# EAGLE board Drone PCB (EAGLE 9.6.2)
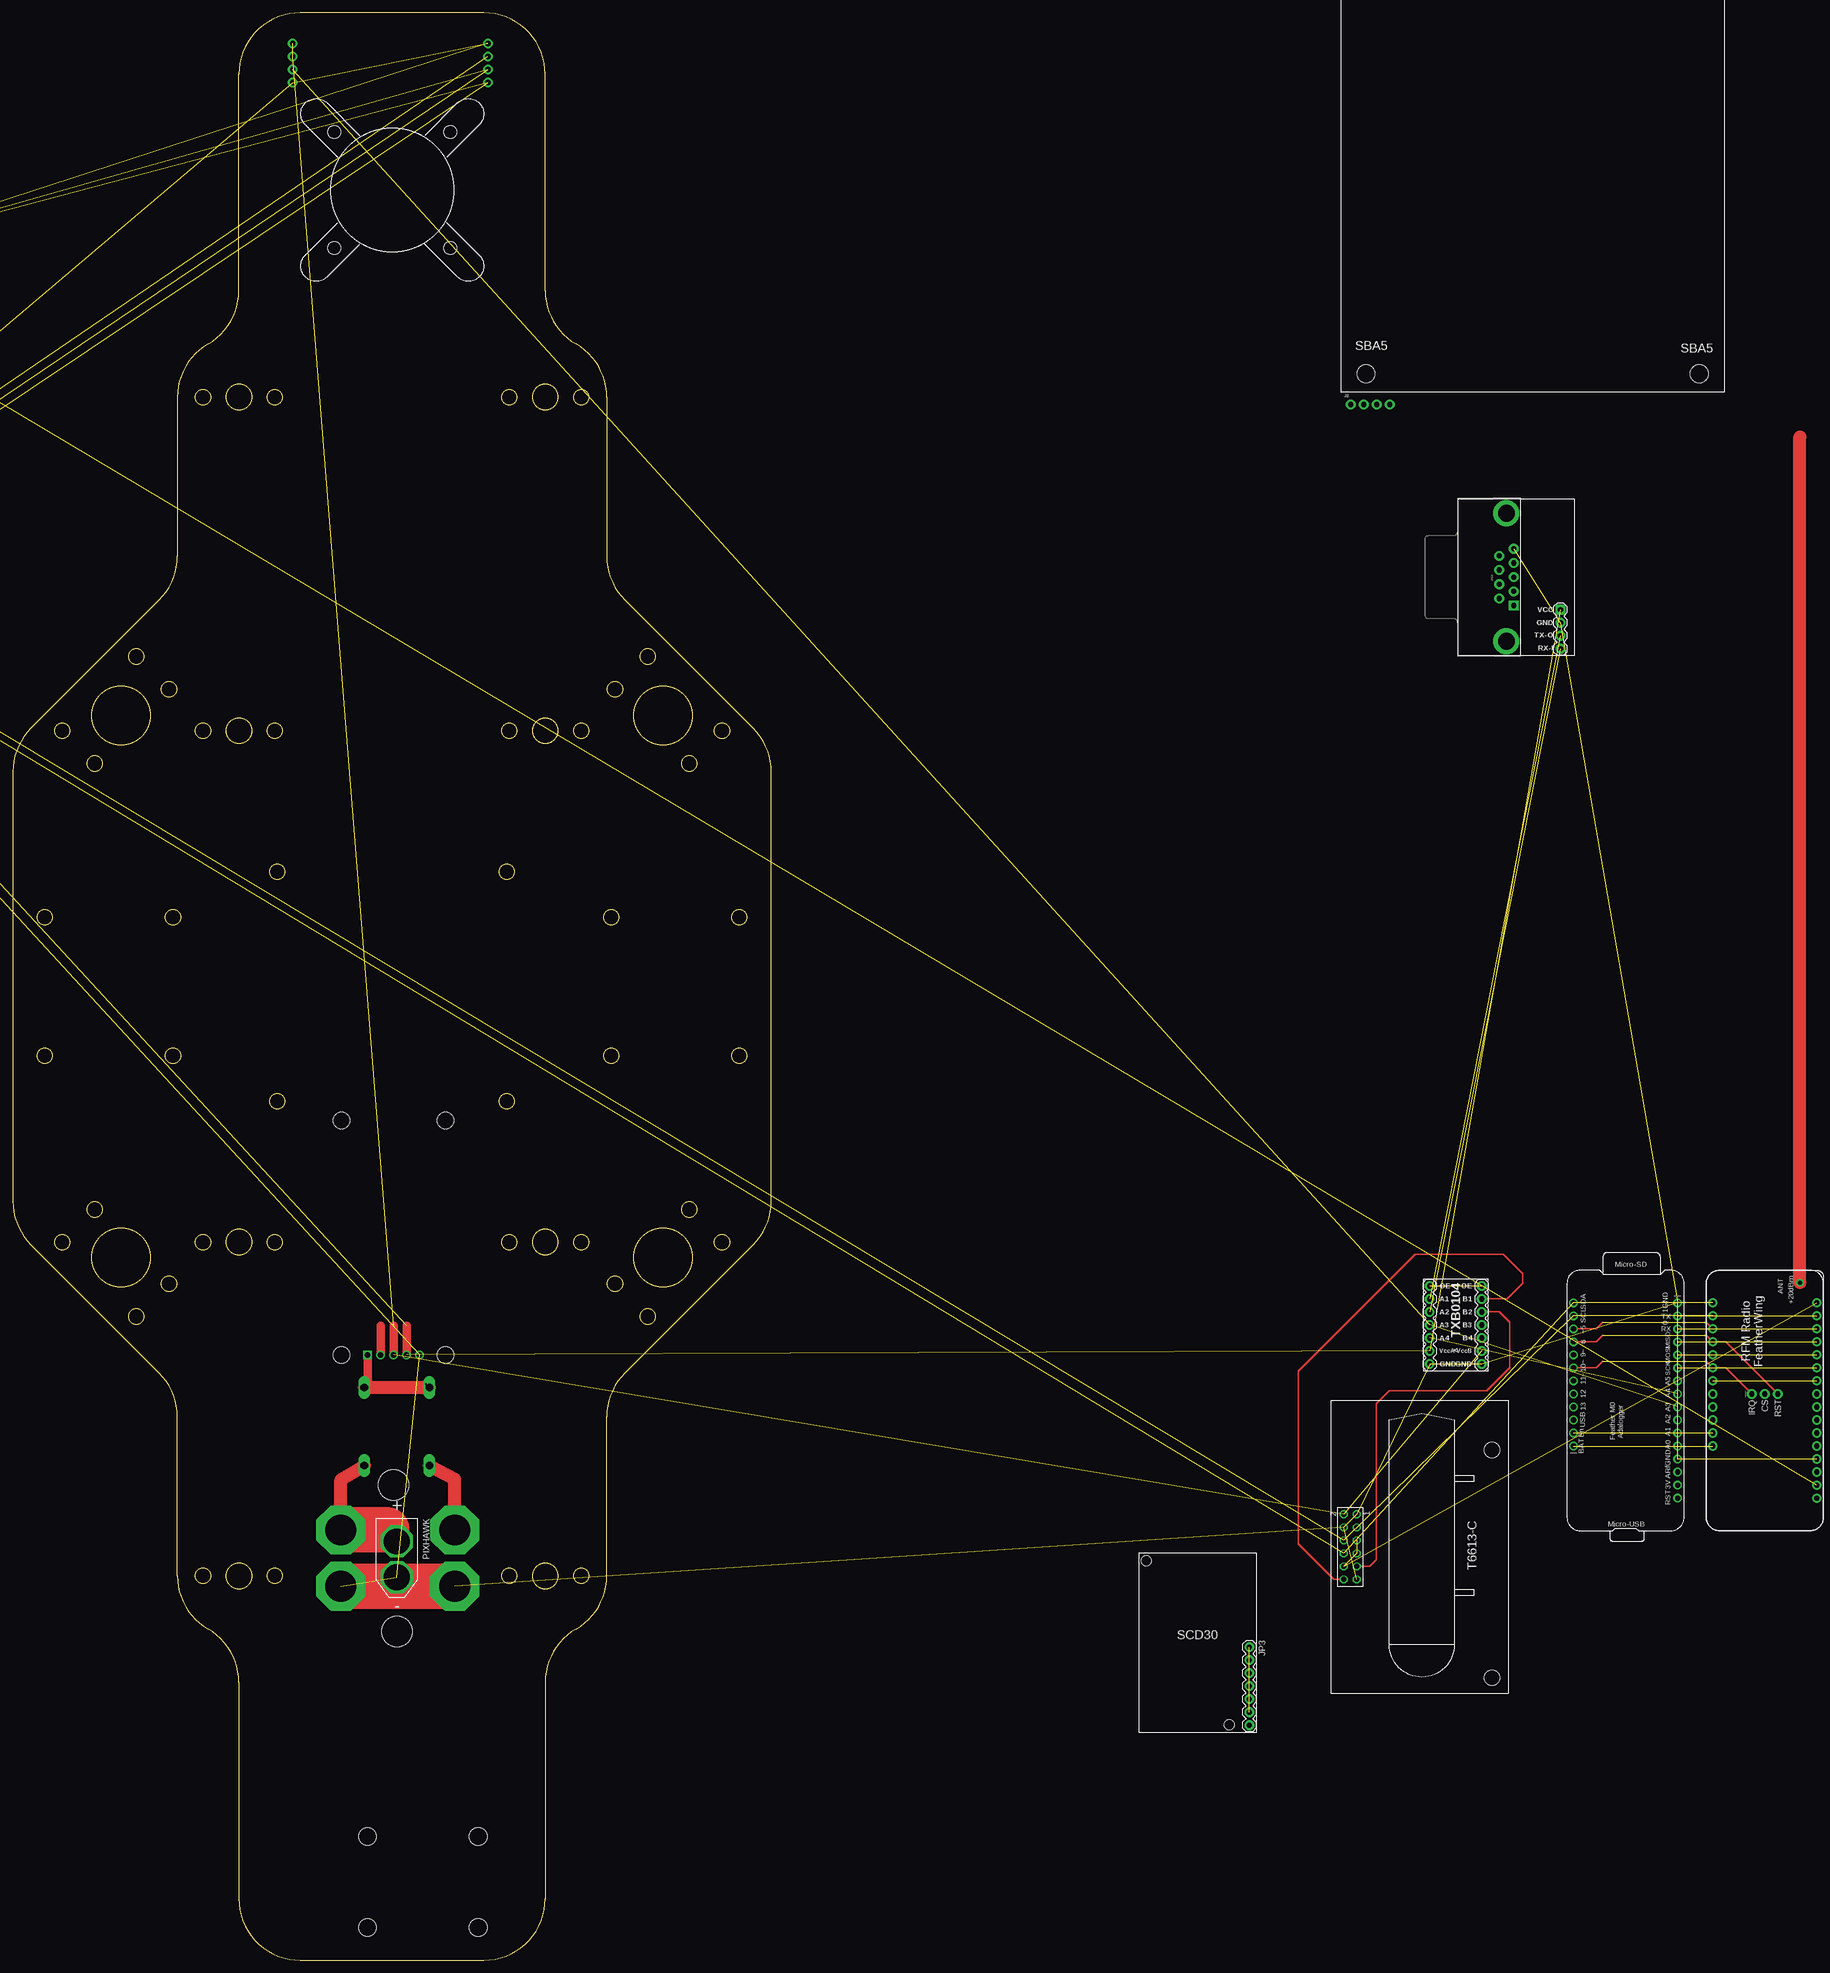
[diagram p0: board, top side]
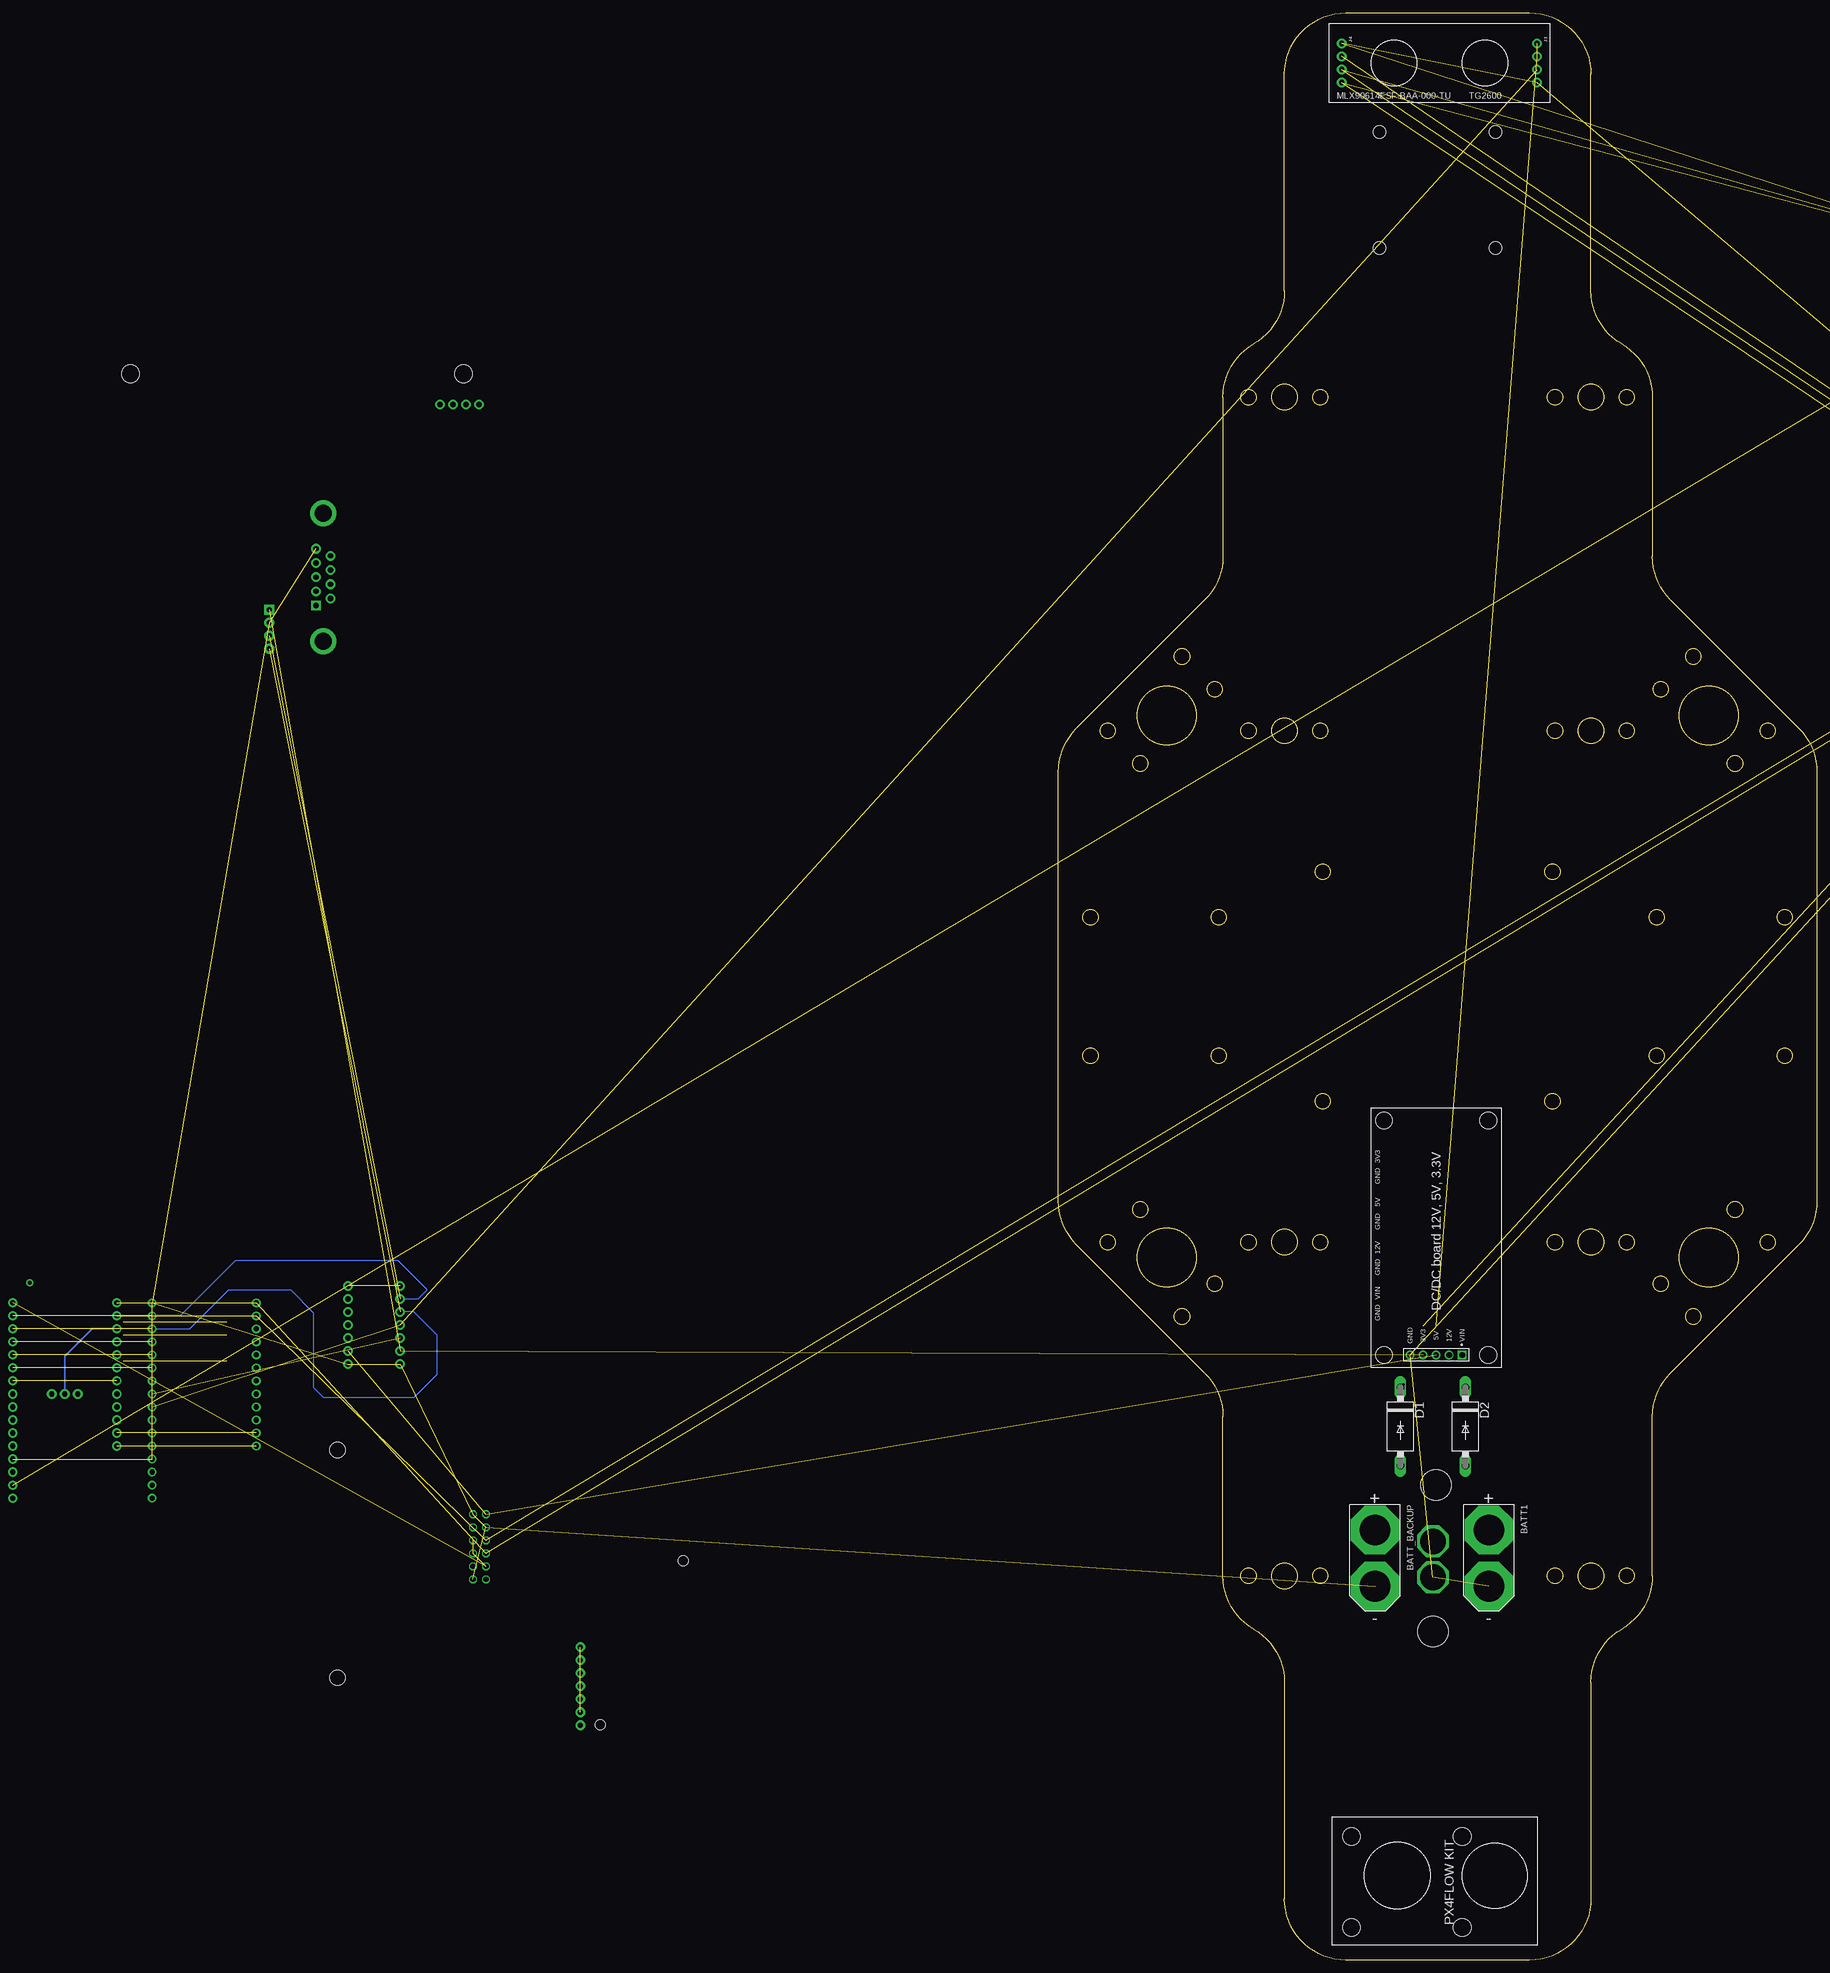
[diagram p1: board, bottom side, seen from below]

Size 148 x 380 mm. Coordinates in mm from the lower left corner, seen from the top.
Outline: 109.9,64.61 arc60 115.9,75 115.9,106.08 arc-45 119.42,114.57 144.49,139.64 arc45 148,148.12 148,231.88 arc45 144.49,240.36 119.42,265.43 arc-45 115.9,273.92 115.9,305 arc60 109.9,315.39 arc-60 103.9,325.79 103.9,368 arc90 91.9,380 56.1,380 arc90 44.1,368 44.1,325.79 arc-60 38.1,315.39 arc60 32.1,305 32.1,273.92 arc-45 28.59,265.43 3.52,240.36 arc45 0,231.88 0,148.12 arc45 3.52,139.64 28.59,114.57 arc-45 32.1,106.08 32.1,75 arc60 38.1,64.61 arc-60 44.1,54.22 44.1,12 arc90 56.1,0 91.9,0 arc90 103.9,12 103.9,54.22 arc-60 109.9,64.61
Outline: circle at 103.9,239.9 radius 2.5
Outline: circle at 116.75,203.5 radius 1.5
Outline: circle at 138.38,239.89 radius 1.5
Outline: circle at 132.02,233.52 radius 1.5
Outline: circle at 117.52,248.02 radius 1.5
Outline: circle at 123.89,254.38 radius 1.5
Outline: circle at 51.1,75 radius 1.5
Outline: circle at 51.1,305 radius 1.5
Outline: circle at 37.1,305 radius 1.5
Outline: circle at 37.1,75 radius 1.5
Outline: circle at 44.1,305 radius 2.5
Outline: circle at 96.9,75 radius 1.5
Outline: circle at 126.89,242.89 radius 5.75
Outline: circle at 44.1,75 radius 2.5
Outline: circle at 96.9,239.9 radius 1.5
Outline: circle at 110.9,239.9 radius 1.5
Outline: circle at 141.75,203.5 radius 1.5
Outline: circle at 116.75,176.5 radius 1.5
Outline: circle at 141.75,176.5 radius 1.5
Outline: circle at 6.25,176.5 radius 1.5
Copper layers (1*16): Top 0.035mm / dielectric 1.5mm / Bottom 0.035mm
Design rules "default": minimum track width 6mil, minimum drill 0.35mm, track to track 6mil, track to pad 6mil, pad to pad 6mil, via to via 6mil, smd to smd 6mil, copper to edge 40mil, drill to drill 6mil, minimum pad ring 10mil, minimum via ring 8mil, stop-mask expansion 4mil, vias tented up to drill 0mil, thermal gap 10mil
Holes 3.3 mm at -88.9,342.9 -68.58,342.9 -63.5,305.05 -43.18,305.05 -63.5,269.49 -43.18,269.49 -88.9,342.9 -63.5,269.49 -43.18,269.49 -68.58,342.9 -63.5,305.05 -43.18,305.05 64.14,118.11 -88.9,342.9 84.45,163.83 84.45,118.11 -63.5,305.05 -43.18,305.05 -43.18,269.49 -63.5,269.49 64.14,163.83 -68.58,342.9 64.14,118.11 64.14,163.83 84.45,163.83 84.45,118.11
Holes 2.5 mm at 85.35,356.75 62.73,356.75 62.73,334.13 85.35,334.13
Holes 3.5 mm at 90.81,24.13 90.81,6.35 69.22,6.35 69.22,24.13 264.08,309.57 264.08,422.57 329.08,309.57 329.08,422.57
Holes 3.05 mm at 288.67,99.57 288.67,55.12
Holes 6 mm at 74.3,92.71 74.93,64.14
Holes 2 mm at 237.41,45.95 221.21,77.95

## Footprints (pad centres in the part's own frame; a part is rotated, then mirrored left to right if it is on the bottom)
XT90 = drill 6 pad 9.5 octagon: + 4.95,4.95; - 4.95,15.95
P2-15 = drill 1.499 long: A 7.62,0; C -7.62,0
STAND-OFF = hole 3.302: 0,0
1X04_NO_SILK = drill 1.016 pad 1.88: 1 0,0; 2 2.54,0; 3 5.08,0; 4 7.62,0
1X04_NO_SILK@1 = drill 1.016 pad 1.88: 1 0,0; 2 2.54,0; 3 5.08,0; 4 7.62,0
61300511121 = drill 1.1 square: 1 -5.08,0 | drill 1.1: 2 -2.54,0; 3 0,0; 4 2.54,0; 5 5.08,0
1X02_NO_SILK = drill 1.016 pad 1.88: 1 0,0; 2 2.54,0
1X06_NO_SILK = drill 1.016 pad 1.88: 1 0,0; 2 2.54,0; 3 5.08,0; 4 7.62,0; 5 10.16,0; 6 12.7,0
1X07 = drill 1.016 pad 1.88: 1 0,0; 2 2.54,0; 3 5.08,0; 4 7.62,0; 5 10.16,0; 6 12.7,0; 7 15.24,0
1X16_ROUND = drill 1 pad 1.676: 1 -19.05,0; 2 -16.51,0; 3 -13.97,0; 4 -11.43,0; 5 -8.89,0; 6 -6.35,0; 7 -3.81,0; 8 -1.27,0; 9 1.27,0; 10 3.81,0; 11 6.35,0; 12 8.89,0; 13 11.43,0; 14 13.97,0; 15 16.51,0; 16 19.05,0
1X12_ROUND = drill 1 pad 1.676: 1 -13.97,0; 2 -11.43,0; 3 -8.89,0; 4 -6.35,0; 5 -3.81,0; 6 -1.27,0; 7 1.27,0; 8 3.81,0; 9 6.35,0; 10 8.89,0; 11 11.43,0; 12 13.97,0
DB9 = drill 1.016 pad 1.88 square: 1 -5.54,-1.42 | drill 1.016 pad 1.88: 2 -2.77,-1.42; 3 0,-1.42; 4 2.77,-1.42; 5 5.54,-1.42; 6 -4.15,1.42; 7 -1.38,1.42; 8 1.38,1.42; 9 4.15,1.42 | drill 3.302 pad 5.08: G1 -12.5,0; G2 12.5,0
1X03_ROUND_76 = drill 1 pad 1.93: 1 -2.54,0; 2 0,0; 3 2.54,0
1X04@1 = drill 1.016 pad 1.88 square: 1 0,0 | drill 1.016 pad 1.88: 2 2.54,0; 3 5.08,0; 4 7.62,0
FEATHERWING_NOHOLES = drill 1 pad 1.778: 1 6.35,1.27; 2 8.89,1.27; 3 11.43,1.27; 4 13.97,1.27; 5 16.51,1.27; 6 19.05,1.27; 7 21.59,1.27; 8 24.13,1.27; 9 26.67,1.27; 10 29.21,1.27; 11 31.75,1.27; 12 34.29,1.27; 13 36.83,1.27; 14 39.37,1.27; 15 41.91,1.27; 16 44.45,1.27; 17 44.45,21.59; 18 41.91,21.59; 19 39.37,21.59; 20 36.83,21.59; 21 34.29,21.59; 22 31.75,21.59; 23 29.21,21.59; 24 26.67,21.59; 25 24.13,21.59; 26 21.59,21.59; 27 19.05,21.59; 28 16.51,21.59
XT60 = drill 5 pad 6.2 octagon: + 4.5,0; - 11.5,0
TSW-106-XX-G-D = drill 1 pad 1.5 octagon: 1 6.35,-1.27; 2 6.35,1.27; 3 3.81,-1.27; 4 3.81,1.27; 5 1.27,-1.27; 6 1.27,1.27; 7 -1.27,-1.27; 8 -1.27,1.27; 9 -3.81,-1.27; 10 -3.81,1.27; 11 -6.35,-1.27; 12 -6.35,1.27

## Placement (x,y rotation side)
BATT1  XT90  [XT90]  59.05,88.9 180 bottom
BATT_BACKUP  XT90  [XT90]  81.28,88.9 180 bottom
D1  [P2-15]  81.28,104.14 270 bottom
D2  [P2-15]  68.58,104.14 270 bottom
H5  STAND-OFF  [STAND-OFF]  -63.5,305.05 0 bottom  (outside the outline)
H6  STAND-OFF  [STAND-OFF]  -43.18,305.05 0 bottom  (outside the outline)
H7  STAND-OFF  [STAND-OFF]  -63.5,269.49 0 bottom  (outside the outline)
H8  STAND-OFF  [STAND-OFF]  -43.18,269.49 0 bottom  (outside the outline)
J1  [1X04_NO_SILK]  261.08,303.57 0 top  (outside the outline)
J2  PTH  [1X04_NO_SILK]  -29.21,321.31 0 bottom  (outside the outline)
J3  [1X04_NO_SILK]  54.61,374.01 270 bottom
J4  PTH  [1X04_NO_SILK@1]  92.71,374.01 270 bottom
J5  61300511121  [61300511121]  74.3,118.11 180 bottom
J6  PTH  [1X04_NO_SILK@1]  -69.85,321.31 0 bottom  (outside the outline)
J7  [1X04_NO_SILK]  -80.01,321.31 0 bottom  (outside the outline)
J10  PTH  [1X04_NO_SILK@1]  -59.69,269.49 180 bottom  (outside the outline)
J11  [1X02_NO_SILK]  -49.53,269.49 180 bottom  (outside the outline)
J12  Serial Interface  [1X06_NO_SILK]  -59.69,306.32 180 bottom  (outside the outline)
JP1  STAND-OFF  [STAND-OFF]  -88.9,342.9 0 bottom  (outside the outline)
JP2  STAND-OFF  [STAND-OFF]  -68.58,342.9 0 bottom  (outside the outline)
JP3  [1X07]  241.29,61.09 270 top  (outside the outline)
JP5  [1X07]  276.48,116.33 90 top  (outside the outline)
JP6  [1X07]  286.64,116.33 90 top  (outside the outline)
JP7  STAND-OFF  [STAND-OFF]  64.14,118.11 270 bottom
JP8  [1X16_ROUND]  324.87,109.22 270 top  (outside the outline)
JP9  [1X12_ROUND]  304.55,114.3 90 top  (outside the outline)
JP10  STAND-OFF  [STAND-OFF]  64.14,163.83 270 bottom
JP11  STAND-OFF  [STAND-OFF]  84.45,163.83 270 bottom
JP12  STAND-OFF  [STAND-OFF]  84.45,118.11 270 bottom
JP13  DB9  [DB9]  291.46,269.88 90 top  (outside the outline)
JP14  [1X03_ROUND_76]  341.88,110.49 0 top  (outside the outline)
JP15  [1X04@1]  302.01,263.52 270 top  (outside the outline)
MS2  FEATHERWING_NOHOLES  [FEATHERWING_NOHOLES]  353.31,83.82 90 top  (outside the outline)
PIXHAWK  XT60  [XT60]  74.93,86.23 270 top
U$3  [AS7265X0]  -48.51,290.7 0 bottom  (outside the outline)
U$5  [SPECTRAL1]  -47.75,288.8 0 bottom  (outside the outline)
U$6  [TRIAD2]  -49.15,286.51 0 bottom  (outside the outline)
U$7  [GND-04]  -59.69,269.88 90 bottom  (outside the outline)
U$8  [3V3-04]  -57.15,269.88 90 bottom  (outside the outline)
U$9  [GND0]  -69.85,321.56 90 bottom  (outside the outline)
U$10  [3V31]  -72.39,321.56 90 bottom  (outside the outline)
U$11  [SDA2]  -74.93,321.56 90 bottom  (outside the outline)
U$12  [SCL3]  -77.47,321.56 90 bottom  (outside the outline)
U$13  [#ALT14]  -80.01,321.44 90 bottom  (outside the outline)
U$14  [#ALT25]  -82.55,321.44 90 bottom  (outside the outline)
U$15  [#ALT36]  -85.09,321.44 90 bottom  (outside the outline)
U$16  [#ALT47]  -87.63,321.44 90 bottom  (outside the outline)
U$17  [SDA-[)]  -54.61,269.88 90 bottom  (outside the outline)
U$18  [SCL-[)]  -52.07,269.88 90 bottom  (outside the outline)
U$19  [INT#-[<-04]  -49.53,269.75 90 bottom  (outside the outline)
U$20  [RST#-[>-04]  -46.99,269.75 90 bottom  (outside the outline)
X2  TSW-106-07-G-D  [TSW-106-XX-G-D]  260.99,80.64 90 top  (outside the outline)

## Library data of the parts
BATT1 BATT_BACKUP PIXHAWK = XT60
D1 D2 = diode
H5-H8 = SparkFun-Hardware
J1 J3 J7 = SparkFun-Connectors; PROD_ID: CONN-09696
J2 = SparkX
J4 J6 J10 J11 JP3 JP5 JP6 JP15 = SparkFun-Connectors
J5 = Headers; CREATED_BY: PCBLayout.com; DIGI_KEY_PART_NUMBER: 732-5318-ND; MANUFACTURER: Wurth Electronics Inc.; MPN: 61300511121
J12 = SparkFun-Connectors; PROD_ID: CONN-08437
JP1 JP2 JP7 JP10-JP12 = SparkFun
JP8 JP9 JP14 MS2 = microbuilder
JP13 = SparkFun-Connectors; PROD_ID: CONN-08194
U$3 U$5 U$6 = buzzard_labels (50)
U$7 U$8 U$17-U$20 = Labels
U$9-U$16 = buzzard_labels
X2 = con-samtec; MF: Samtec Inc.; MPN: TSW-106-07-G-D

## Nets
3.3V: J2.2 J6.2 MS2.2
3V1: JP3.7
3V3: J4.2 J5.4 J10.2 JP5.2 JP15.1
5V: J3.1 J3.2 J5.3 JP6.2 X2.2
12V: J5.2
12V1: J1.1
!ALT1: J7.1
!ALT2: J7.2
!ALT3: J7.3
!ALT4: J7.4
!RESET: JP8.16
+3V3: JP8.15
A0: JP8.12
A1: JP8.11
A2: JP8.10
A3: J3.3 JP5.4 JP8.9
A4: JP5.3 JP8.8
A5: JP8.7
AREF: JP8.14
AV_OUT: X2.3
B3: JP6.4
B4: JP6.3
C: MS2.21
CS: JP9.10 JP14.2 MS2.19
D9: JP9.8
D11: JP9.6
D12: JP9.5
D13: JP9.4
EN: JP9.2 MS2.27
F: MS2.10 MS2.23
G: MS2.24
GND: BATT1.- BATT_BACKUP.- J2.1 J3.4 J4.1 J5.5 J6.1 J10.1 JP5.1 JP6.1 JP8.1 JP8.13 JP13.5 JP15.2 MS2.4 PIXHAWK.- X2.1 X2.4 X2.11
GND1: J1.4
GND2: JP3.1 JP3.6
H: MS2.25
I: MS2.5
IRQ: JP9.7 JP14.1 MS2.22
J: MS2.6
K: MS2.7
L: MS2.8
M: MS2.9
MISO: JP8.4 MS2.13
MOSI: JP8.5 MS2.12
N$2: BATT_BACKUP.+ D1.A
N$7: MS2.3
N$25: MS2.1
NC: MS2.16 X2.5 X2.7 X2.10
OE: JP5.7 JP6.7
PWM: JP3.2
RDY: JP3.3
RS-IN: JP13.3
RS-OUT: JP13.2
RS_RX: J1.3
RS_TX: J1.2
RST: JP9.9 JP14.3 MS2.20
RX: JP5.5 JP8.3 JP15.4 MS2.14
RX-5V: JP6.6 X2.12
SCK: JP8.6 MS2.11
SCL: J2.4 J4.4 J6.4 J10.4 JP9.11 MS2.18 X2.6
SCL1: JP3.5
SDA: J2.3 J4.3 J6.3 J10.3 JP9.12 MS2.17 X2.8
SDA1: JP3.4
TX: JP5.6 JP8.2 JP15.3 MS2.15
TX-5V: JP6.5 X2.9
USB: MS2.26
VBAT: JP9.1 MS2.28
VBATT: BATT1.+ D2.A PIXHAWK.+
VBUS: JP9.3
VIN: D1.C D2.C J5.1

## Tracks (layer width: path | path; a pad name or v marks a point on that pad's centre or on a via)
3.3V  (2 unrouted)
3V3  (4 unrouted)
  Top 1.651: J5.4 76.83,123.83
5V  (4 unrouted)
  Top 1.651: J5.3 74.3,123.83
12V
  Top 1.651: J5.2 71.75,123.83
A3  (2 unrouted)
A4  (1 unrouted)
ANT  (via drill 0.8 pad 1.42)
  Top 2.54: v348.74,132.21 348.74,297.18
CS  (1 unrouted)
  Top 0.305: MS2.19 330.45,124.46 | 310.26,124.46 308.99,123.19 JP9.10
  Bottom 0.305: JP14.2 341.88,117.86 336.55,123.19 MS2.19
EN  (1 unrouted)
F  (1 unrouted)
GND  (17 unrouted)
  Top 8.89: BATT1.- BATT_BACKUP.-
GND2  (1 unrouted)
IRQ  (1 unrouted)
  Top 0.305: JP14.1 334.26,115.57 MS2.22 330.45,116.84 | 310.26,116.84 308.99,115.57 JP9.7
MISO  (1 unrouted)
MOSI  (1 unrouted)
N$2
  Top 2.54: BATT_BACKUP.+ 86.23,93.86 D1.A
NC  (3 unrouted)
OE  (1 unrouted)
RST  (1 unrouted)
  Top 0.305: JP14.3 334.26,120.65 MS2.20 330.45,121.92 | 310.26,121.92 308.99,120.65 JP9.9
RX  (2 unrouted)
  Bottom 0.203: JP8.3 317.5,123.19 309.88,130.81 297.81,130.81 293.37,126.36 293.37,111.76 291.46,109.86 273.69,109.86 269.24,114.3 269.24,121.92 273.81,126.49 JP5.5
RX-5V
  Top 0.305: X2.12 257.81,74.3 250.82,81.28 250.82,114.94 273.69,137.79 290.83,137.79 294.64,133.99 294.64,132.08 291.59,129.03 JP6.6
SCK  (1 unrouted)
SCL  (6 unrouted)
SDA  (6 unrouted)
TX  (2 unrouted)
  Bottom 0.203: JP5.6 272.92,129.03 271.14,130.81 276.86,136.53 308.61,136.53 319.4,125.73 JP8.2
TX-5V
  Top 0.305: JP6.5 290.07,126.49 292.1,124.46 292.1,115.57 287.65,111.12 268.61,111.12 266.06,108.58 266.06,78.11 264.8,76.83 X2.9
VBAT  (1 unrouted)
VBATT
  Top 2.54: BATT1.+ 64,93.72 D2.A
  Top 5.842: 72.97,83.95 PIXHAWK.+
  Top 8.89: BATT1.+ 72.97,83.95
VIN  (via drill 0.35)
  Top 1.651: v80.64,112.39 D1.C | D2.C 69.22,112.39 J5.1
  Top 2.54: D2.C D1.C

## Text on the board
tPlace: SBA5 | SBA5 | SBA5 | SBA5 | VCC | GND | TX-O | RX-I | Micro-SD | +20dBm | OE | OE | ANT | A1 | B1 | SDA | GND | 1 | A2 | B2 | SCL | TX | A3 | B3 | 0 | ~5 | RX | RFM Radio / FeatherWing | A4 | TXB0104 | B4 | 6 | MISO | VccA | > | VccB | ~ | 9 | MOSI | ~ | GND | GND | 10 | SCK | ~ | 11 | A5 | A4 | 12 | IRQ | CS | RST | 13 | A3 | USB | A2 | Feather M0 / Adalogger | En | A1 | A0 | BAT | GND | ARf | 3V | RST | T6613-C | Micro-USB | SCD30
bPlace: TG2600 | MLX90614ESF-BAA-000-TU | MCP9600 | 3V3 | GND | 5V | GND | DC/DC board 12V, 5V, 3.3V | 12V | GND | VIN | GND | VIN | 12V | 5V | 3V3 | GND | PX4FLOW KIT
bNames: Lagopus B V2.0 | SDA | +3V3 | SCL | GND